# EAGLE board CircuitRiver - Breakout Spring (EAGLE 7.5.0)
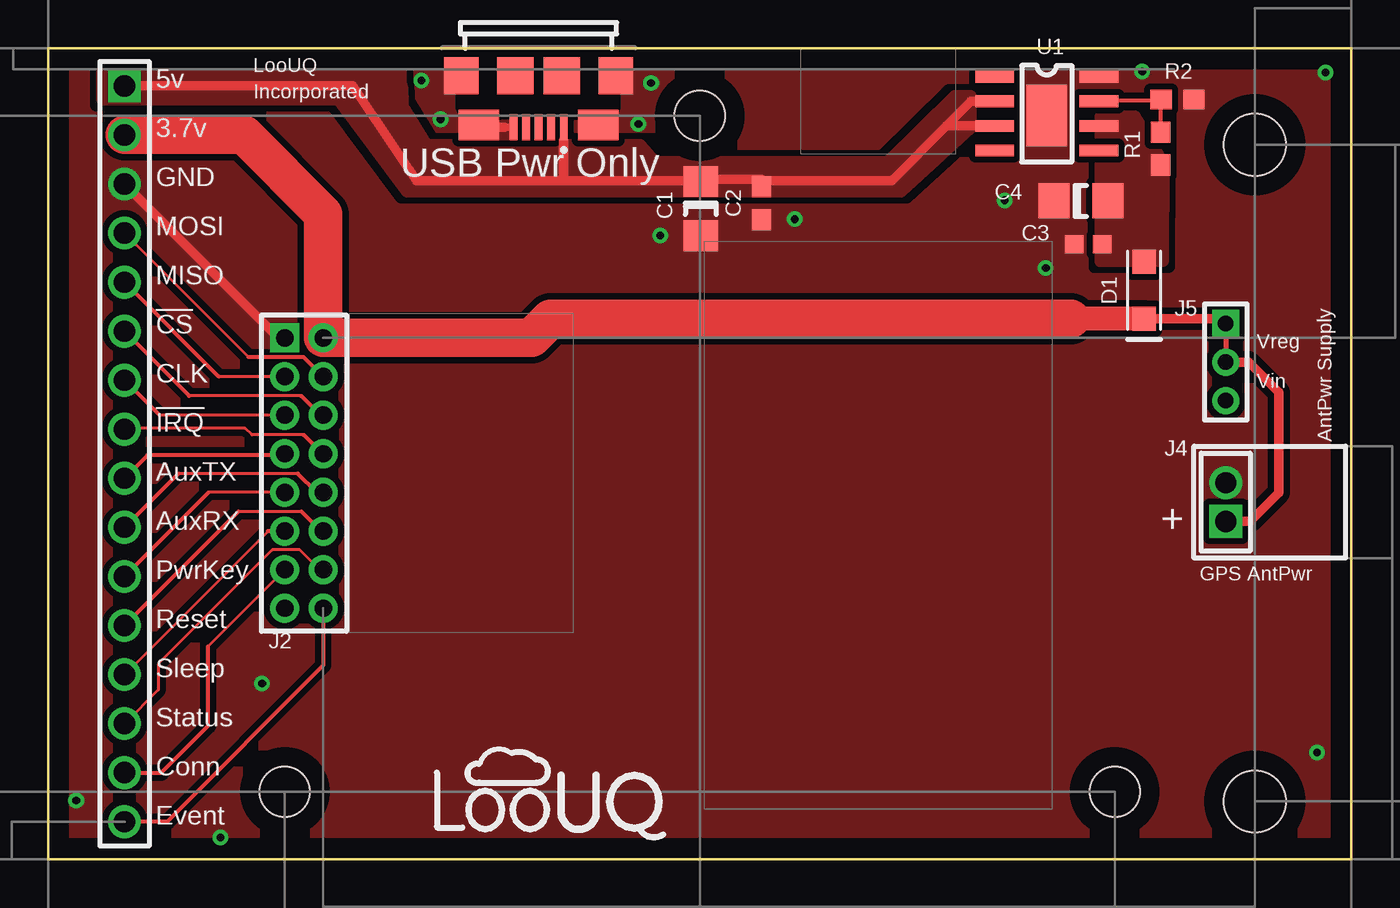
[diagram p0: board, top side]
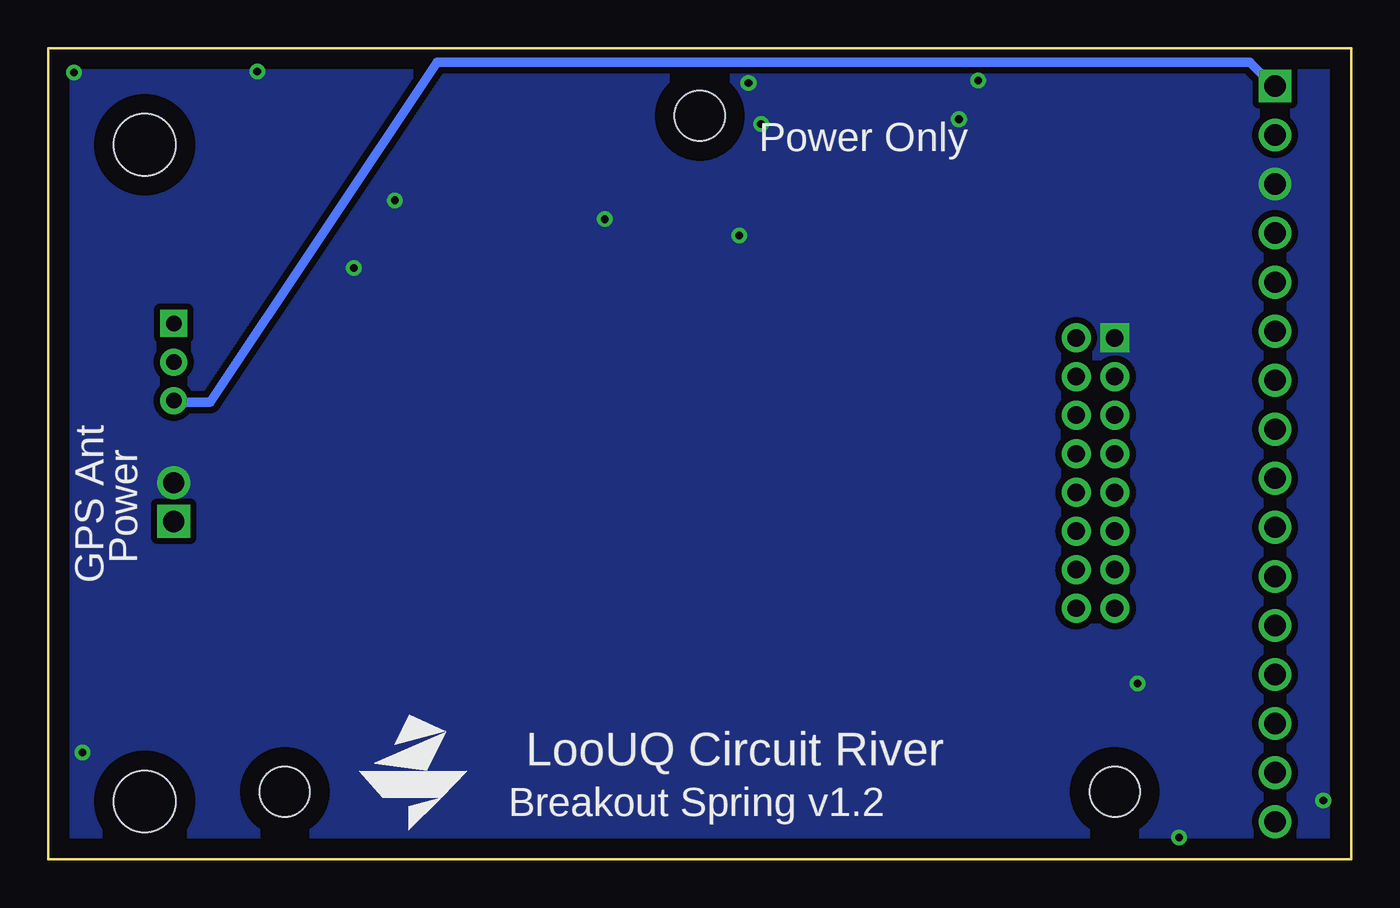
[diagram p1: board, bottom side, seen from below]

Size 67.5 x 42 mm. Coordinates in mm from the lower left corner, seen from the top.
Outline: 0,0 0,42 67.5,42 67.5,0 0,0
Copper layers (1*16): Top 0.035mm / dielectric 1.5mm / Bottom 0.035mm
Design rules "default *": minimum track width 10mil, minimum drill 0.61mm, track to track 8mil, track to pad 8mil, pad to pad 8mil, via to via 8mil, smd to smd 8mil, copper to edge 40mil, drill to drill 8mil, minimum pad ring 0mil, minimum via ring 8mil, stop-mask expansion 4mil, vias tented up to drill 16mil, thermal gap 10mil
Net classes: 0 Default: width 0.15 mm, clearance 0.2 mm, clearance 0.2 mm to class 1; 1 Power: width 0.5 mm, clearance 0.2 mm, clearance 0.2 mm to class 0
Holes 3.2 mm at 62.5,37 62.5,3
Holes 2.6 mm at 12.25,3.5 55.25,3.5 33.75,38.5

## Footprints (pad centres in the part's own frame; a part is rotated, then mirrored left to right if it is on the bottom)
CAP_1206 = smd 1.6 x 1.8: 1 -1.4,0; 2 1.4,0
CAP_0603 = smd 1.1 x 1: 1 -0.85,0; 2 0.85,0
0603_NP = smd 0.95 x 0.95: 1 -0.725,0; 2 0.725,0
CAP_1206_C4 = smd 1.6 x 1.8: 1 -1.4,0; 2 1.4,0
SOD-123FL_Diode = smd 1.25 x 1.22: 1 -1.475,0; 2 1.475,0
HDR-1x16T/2.54 = drill 1.1 pad 1.7 square: 1 -19.05,0 | drill 1.1 pad 1.7: 2 -16.51,0; 3 -13.97,0; 4 -11.43,0; 5 -8.89,0; 6 -6.35,0; 7 -3.81,0; 8 -1.27,0; 9 1.27,0; 10 3.81,0; 11 6.35,0; 12 8.89,0; 13 11.43,0; 14 13.97,0; 15 16.51,0; 16 19.05,0
HDR-2x8T/2x2/16x4 = drill 0.9 pad 1.5 square: 1 -7,-1 | drill 0.9 pad 1.5: 2 -7,1; 3 -5,-1; 4 -5,1; 5 -3,-1; 6 -3,1; 7 -1,-1; 8 -1,1; 9 1,-1; 10 1,1; 11 3,-1; 12 3,1; 13 5,-1; 14 5,1; 15 7,-1; 16 7,1
ZX62-B-5P = smd 0.4 x 1.35: 1 -1.3,1.475; 2 -0.65,1.475; 3 0,1.475; 4 0.65,1.475; 5 1.3,1.475 | smd 2.1 x 1.6: 6 -3.1,1.35; 7 3.1,1.35 | smd 1.8 x 1.9: 8 -4,-1.2; 9 4,-1.2 | smd 1.9 x 1.9: 10 -1.2,-1.2; 11 1.2,-1.2
JST_PH-2_T/H = drill 1.1 pad 1.7 square: 1 0,-1 | drill 1.1 pad 1.7: 2 0,1
HDR-1x3T/2/6x2 = drill 0.8 pad 1.4 square: 1 -2,0 | drill 0.8 pad 1.4: 2 0,0; 3 2,0
RES_0603 = smd 1.1 x 1: 1 -0.85,0; 2 0.85,0
SOIC-8EP/150mil = smd 2 x 0.6: 1 -2.7,1.905; 2 -2.7,0.635; 3 -2.7,-0.635; 4 -2.7,-1.905; 5 2.7,-1.905; 6 2.7,-0.635; 7 2.7,0.635; 8 2.7,1.905 | smd 2.1 x 3.2: 9 0,-0.1

## Placement (x,y rotation side)
C1  220uF  [CAP_1206]  33.8,33.7 270 top
C2  10uF  [CAP_0603]  36.95,33.98 90 top
C3  0.1uF  [0603_NP]  53.88,31.85 0 top
C4  220uF  [CAP_1206_C4]  53.5,34.1 0 top
D1  SCHOTTKY RECT - 2A60V  [SOD-123FL_Diode]  56.77,29.48 90 top
J1  DoNotMount  [HDR-1x16T/2.54]  3.95,21 270 top
J2  HA-CTA HEADER  [HDR-2x8T/2x2/16x4]  13.25,20 270 top
J3  USB JACK  [ZX62-B-5P]  25.4,39.38 180 top
J4  JST PH-2 T/H  [JST_PH-2_T/H]  61,18.5 0 top
J5  3PIN T/H HEADER  [HDR-1x3T/2/6x2]  61,25.75 270 top
LG1  LOOUQ LOGO  [LooUQ-6mm]  26,3.37 0 top
LG2  CIRCUITRIVER LOGO  [CircuitRiver-6mm]  48.6,4.5 0 bottom
R1  10K  [RES_0603]  57.62,36.8 270 top
R2  1.5K  [RES_0603]  58.5,39.35 180 top
U1  SC4215HSETRT  [SOIC-8EP/150mil]  51.73,38.62 0 top

## Library data of the parts
C1 = common; DATASHEET: https://search.murata.co.jp/Ceramy/image/img/A01X/G101/ENG/GRM31CR60J227ME11-01.pdf; MANUFACTURER: Murata; MFGPARTNM: GRM31CR60J227ME11L
C2 = common; MANUFACTURER: Samsung; MFGPARTNM: CL10A106MQ8NNNC
C3 = common; MANUFACTURER: Samsung; MFGPARTNM: CL10B104KB8NNNC
C4 = common; MANUFACTURER: Murata; MFGPARTNM: GRM31CR60J227ME11L
D1 = common; DATASHEET: https://www.onsemi.com/pub/Collateral/NTS260ESF-D.PDF; DESCRIPTION: DIODE SCHOTTKY 60V 2A SOD123FL; MANUFACTURER: On Semiconductor; MFGPARTNM: NRVTS260ESFT1G
J1 LG1 LG2 = common
J2 = common; DATASHEET: https://cdn.harwin.com/pdfs/M22-204.pdf; MANUFACTURER: Harwin; MFGPARTNM: M22-2040805
J3 = common; DATASHEET: http://datasheets.diptrace.com/con_usb/ZX62-B-5P.pdf; MANUFACTURER: Hirose; MFGPARTNM: ZX62-B-5PA(33)
J4 = common; DATASHEET: https://media.digikey.com/pdf/Data%20Sheets/3M%20PDFs/951yyy-xx22-AR_Series%20Datasheet.pdf; MANUFACTURER: JST; MFGPARTNM: 951102-8622-AR
J5 = common; DATASHEET: https://media.digikey.com/pdf/Data%20Sheets/3M%20PDFs/951yyy-xx22-AR_Series%20Datasheet.pdf; MANUFACTURER: 3M; MFGPARTNM: 951103-8622-AR
R1 = common; MANUFACTURER: Stackpole; MFGPARTNM: RNCP0603FTD10K0
R2 = common; MANUFACTURER: Stackpole; MFGPARTNM: RNCP0603FTD1K50
U1 = common; DATASHEET: https://www.semtech.com/uploads/documents/sc4215a.pdf; DESCRIPTION: IC REG LINEAR POS ADJ 2A 8SOIC; MANUFACTURER: Semtech; MFGPARTNM: SC4215HSETRT

## Nets
Net_0 [Power]: C1.1 C2.2 J1.1 J3.1 J5.3 U1.2 U1.3
Net_1 [Power]: D1.1 J1.2 J2.2 J4.1 J5.1 J5.2
Net_2: R1.1 R2.2 U1.7
Net_3: J1.16 J2.16
Net_4: J1.15 J2.13
Net_5: J1.14 J2.14
Net_6: J1.13 J2.11
Net_7: J1.12 J2.12
Net_8: J1.11 J2.9
Net_9: J1.10 J2.10
Net_10: J1.9 J2.7
Net_11: J1.8 J2.8
Net_12: J1.7 J2.5
Net_13: J1.6 J2.6
Net_14: J1.5 J2.3
Net_15: J1.4 J2.4
Net_GND [Power]: C1.2 C2.1 C3.1 C4.1 J1.3 J2.1 J3.5 J3.6 J3.7 J3.8 J3.9 J4.2 R2.1 U1.8 U1.9
VBAT [Power]: C3.2 C4.2 D1.2 R1.2 U1.6

## Tracks (layer width: path | path; a pad name or v marks a point on that pad's centre or on a via)
Net_0
  Top 0.4: J3.1 26.7,37.23
  Top 0.5: J1.1 15.76,40.05 19.07,35.15 26.7,35.15 | 26.7,35.15 33.83,35.15 | 33.83,35.15 33.83,35.23 36.95,35.23 36.95,35.15 | 36.95,35.15 43.7,35.15 46.53,37.98 | 46.53,37.98 U1.3 | C1.1 33.83,35.15 | C2.2 36.95,35.15 | 26.7,37.23 26.7,35.15 | U1.2 47.8,39.26 46.53,37.98
  Bottom 0.5: J5.3 61,23.68 59.12,23.68 47.35,41.27 5.25,41.27 4.03,40.05 J1.1
  pour Top (isolate 0.33, rank 2, no thermals): 2.79,41.23 2.79,39.37 15.03,39.37 18.58,34.59 44.18,34.59 47.78,37.89 47.78,39.51 46.98,39.51 43.5,36.11 31.41,36.13 30.66,36.98 19.6,36.98 18.36,39.01 18.31,41.23
Net_1
  Top 0.25: J5.1 J5.2
  Top 0.5: D1.1 60.75,28 J5.1 | J5.2 62.2,25.75 63.75,24.2 63.75,18.98 62.27,17.5 J4.1
  Top 1.25: D1.1 52.98,28
  Top 2: 52.98,28 26.02,28 25.02,27 J2.2 14.25,33.4 10.14,37.51 J1.2
Net_2
  Top 0.2: R1.1 57.62,39.33 R2.2 57.65,39.27 54.45,39.27 U1.7
Net_3
  Top 0.2: J2.16 14.25,10.05 6.15,1.95 J1.16
Net_4
  Top 0.15: 8.28,11.03 J2.13
  Top 0.2: J1.15 5.84,4.49 8.28,6.92 8.28,11.03
Net_5
  Top 0.15: J2.14 14.05,15 13.03,16.02 11.6,16.02 5.7,10.12 5.7,8.78 J1.14
Net_6
  Top 0.15: 11.38,17 J1.13
  Top 0.2: J2.11 11.38,17
Net_7
  Top 0.15: 13.12,18 9.84,18
  Top 0.2: J2.12 14.12,17 13.12,18 | 9.84,18 J1.12
Net_8
  Top 0.15: J2.9 8.3,19
  Top 0.2: 8.3,19 J1.11
Net_9
  Top 0.15: 12.93,19.98 6.74,19.98
  Top 0.2: J2.10 13.9,19 12.93,19.98 | 6.74,19.98 J1.10
Net_10
  Top 0.2: J2.7 12.25,20.93 5.14,20.93 J1.9
Net_11
  Top 0.15: 13.22,21.98 10.55,21.98 10.2,22.32 3.9,22.32
  Top 0.2: J2.8 14.2,21 13.22,21.98 | 3.9,22.32 J1.8
Net_12
  Top 0.15: J2.5 5.76,23
  Top 0.2: 5.76,23 J1.7
Net_13
  Top 0.15: 13.1,24 7.3,24
  Top 0.2: J2.6 14.1,23 13.1,24 | 7.3,24 J1.6
Net_14
  Top 0.15: J2.3 8.84,25
  Top 0.2: 8.84,25 J1.5
Net_15
  Top 0.15: 10.38,26 J1.4
  Top 0.2: J2.4 14.22,25 13.22,26 10.38,26
Net_GND  (via drill 0.4 pad 0.8)
  Top 0.4: J3.5 23.65,37.9
  Top 0.5: J2.1 11.92,27 J1.3 | 23.65,37.9 22.43,37.9 J3.7
  other vias: 19.32,40.33 20.32,38.33 30.57,38.08 31.23,40.2 31.7,32.3 66.17,40.75 38.67,33.15 1.45,3.05 11.07,9.1 8.93,1.12 49.55,34.12 51.67,30.62 65.72,5.53 56.67,40.8
  pour Bottom (isolate 0.33, rank 9, no thermals): 0.77,41.18 0.77,0.77 66.73,0.77 66.73,41.18
  pour Top (isolate 0.33, rank 9): 0.77,41.23 0.77,0.77 66.68,0.77 66.68,41.23
VBAT
  pour Top (isolate 0.33, no thermals): 54.52,30.97 57.73,30.99 57.76,36.04 56.3,38.46 54.54,38.46

## Text on the board
tPlace: 5v | LooUQ | Incorporated | 3.7v | USB Pwr Only | GND | MOSI | MISO | !CS | Vreg | CLK | Vin | !IRQ | AntPwr Supply | AuxTX | AuxRX | + | PwrKey | GPS AntPwr | Reset | Sleep | Status | Conn | Event
bPlace: Power Only | GPS Ant | Power | LooUQ Circuit River | Breakout Spring v1.2
tDocu: LTEm1 USB | Connector | Keepout | LTEm1 SIM